# Altium PCB FCM_Integrated_other Old.PcbDoc (part 2 of 3)
Units mil, origin at the board's own origin, x right, y up, seen from the top; angles counter-clockwise.
Board outline 6000 x 4366 mil, 4 copper layers (Top Layer, Power, Ground, Bottom Layer), stack 23.756 mil thick; 165 components, 92 nets, 633 pads, 170 vias.
Unrouted connection lines stored in the file: 134.
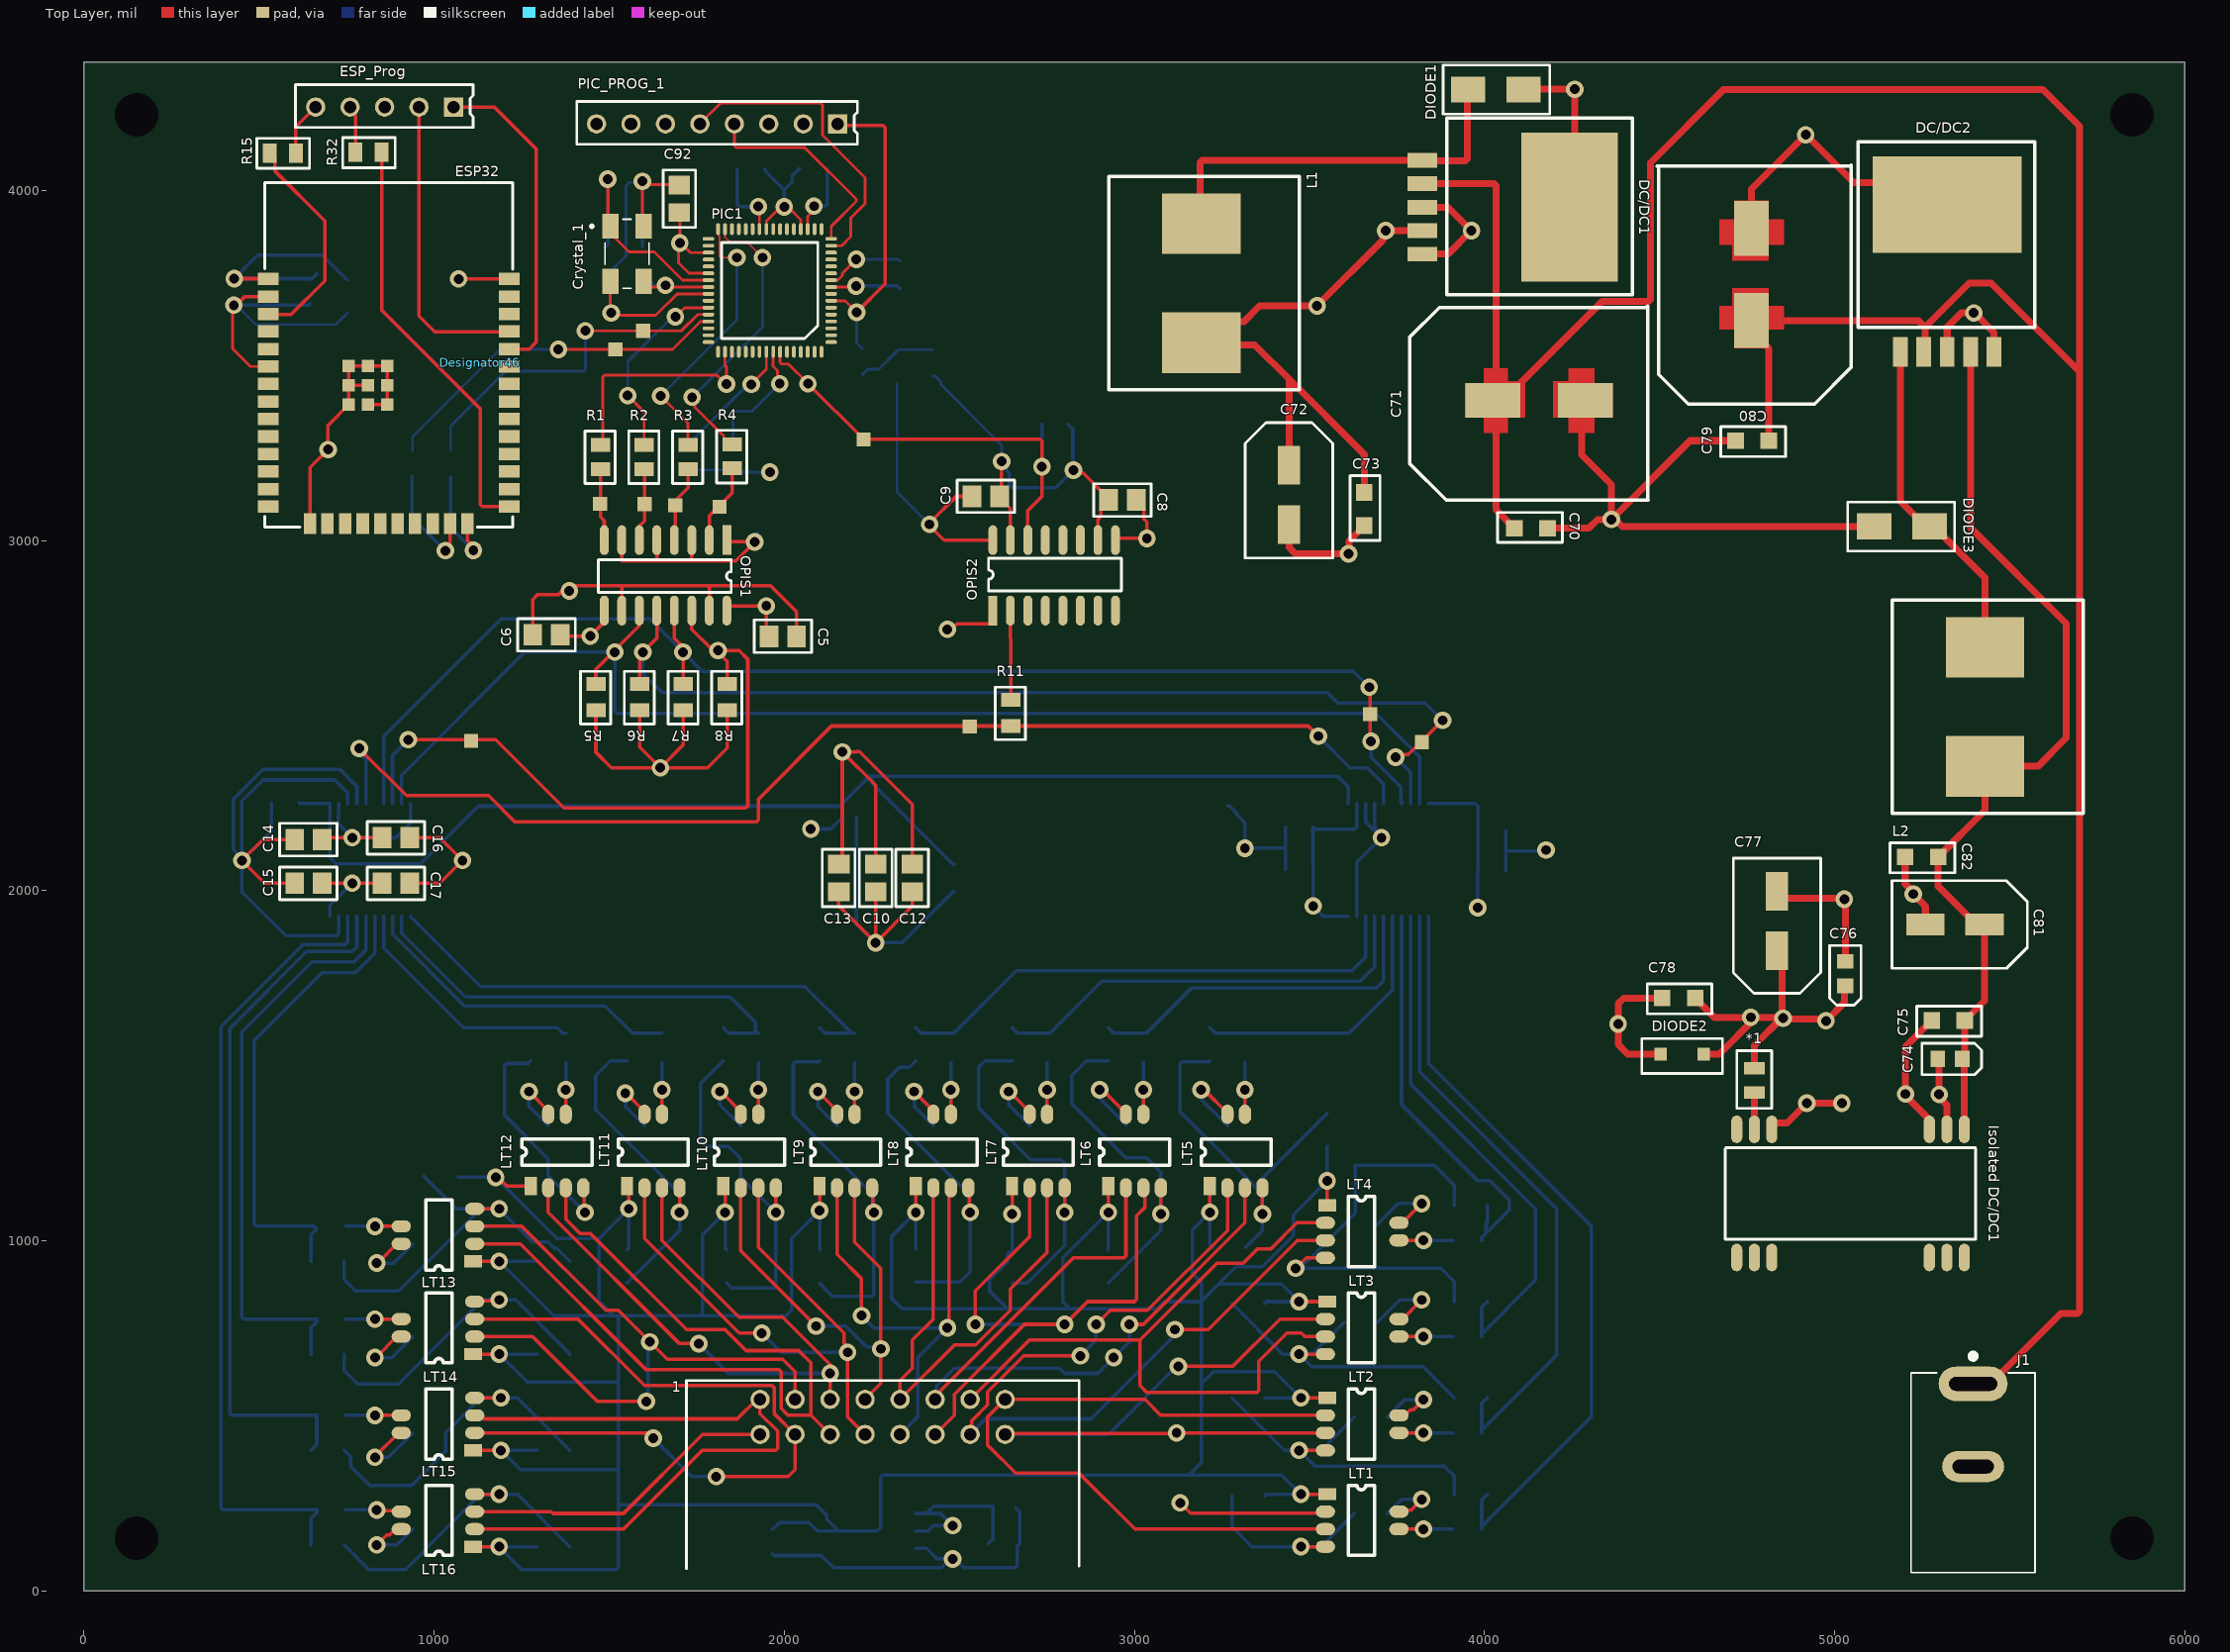
[diagram p0: Top Layer view]

## Part data (continued)
U1: "Precision Micropower, Low Dropout Voltage Reference, 2.048 V Output, 2.3 to 15 V Supply, Industrial, 8-pin SOIC (R-8), Reel", Manufacturer="Analog Devices", Operating Temp Range="-40 to 85 degC", Code_JEDEC=MS-012-AA, ComponentLink1Description="Manufacturer URL", ComponentLink1URL=http://www.analog.com/en/index.html, ComponentLink2Description=Datasheet, ComponentLink2URL=http://www.analog.com/static/imported-files/data_sheets/REF19xSeries.pdf, ComponentLink3Description="Package Specification", ComponentLink3URL=http://www.analog.com/static/imported-files/packages/PKG_PDF/SOIC_Narrow%20(R)/R_8.pdf, ComponentLink4Description="URL Link1", ComponentLink4URL="Product URL:http://www.analog.com/en/special-linear-functions/voltage-references/ref191/products/product.html", DatasheetVersion="Rev. L", Mounting Technology="Surface Mount", PackageDescription="8-Pin Standard Small Outline Package, Body 4.9 x 3.9 mm, Pitch 1.27 mm", PackageReference=R-8, PackageVersion="060506-A, 06/2006", Packing=Reel, PartNumber=REF191GSZ-REEL, Ref Out TC (ppm/C)=10, Vout=2.048V
Vref_1: library part MAX6037AAUKADJ+T, "IC VREF SERIES ADJ 0.2% SOT23-5", Case/Package=SOT-23-5, Manufacturer=Maxim, Max Input Voltage=5.5V, Max Operating Temperature=125°C, Max Output Current=5mA, Max Output Voltage=5V, Max Supply Current=250uA, Min Operating Temperature=-40°C, Min Output Voltage=1.184V, Package Quantity=1, Supplier Part Number 1=MAX6037AAUKADJ+TCT-ND, Temperature Coefficient=25ppm/°C, Tolerance=0.2%, Category="Voltage References", ComponentLink1Description=https://datasheet.ciiva.com/2008/max6037-max6037c-2008462.pdf?src-supplier=Digi-Key, ComponentLink1URL=https://datasheet.ciiva.com/2008/max6037-max6037c-2008462.pdf?src-supplier=Digi-Key, ComponentLink2Description=https://datasheet.ciiva.com/2008/max6037-max6037c-2008463.pdf?src-supplier=Digi-Key, ComponentLink2URL=https://datasheet.ciiva.com/2008/max6037-max6037c-2008463.pdf?src-supplier=Digi-Key, ComponentLink3Description=https://datasheet.ciiva.com/2008/max6037-max6037c-2008461.pdf?src-supplier=Digi-Key, ComponentLink3URL=https://datasheet.ciiva.com/2008/max6037-max6037c-2008461.pdf?src-supplier=Digi-Key, Lead Free="Lead Free", Manufacturer Part Number=MAX6037AAUKADJ+T, Mount="Surface Mount", Number of Pins=5, Operating Supply Current=250uA, Output Current=5mA, Output Type=Adjustable, Output Voltage=5V, Packaging="Tape and Reel", Radiation Hardening=No, REACH SVHC=Unknown, Reference Type=Series,Adjustable, Reference Voltage=5V, RoHS=Yes, RoHS Compliant=Yes, Series=-, Supplier 1=Digi-Key, Weight=0.001058oz

## Free pads (board coordinates)
  rect 40x40 smd: 1(1106,2428) 1(1474,3105) 1(1517.84,3545.76) 1(1597,3599) 1(1601,3104) 1(1689,3101) 1(1815,3096) 1(2227,3289) 1(2530,2469) 1(3673.5,2503.5) 1(3821,2424)
  rect 40x40 smd far side: 1(1666,244) 1(2436,2325) 1(2989,331)
  round 60 hole 125: 2(150,150) 3(150,4216) 3(5850,150) 3(5850,4216)

## Via types
v1: diameter 50, hole 28, Top Layer to Bottom Layer, 170 vias

## Nets (pads, with @x,y where several pads share a name; then routed paths per layer and width w, separated by ;. In a path a pad name is that pad's centre, name@x,y a point inside that pad or via, vN(x,y) a via of type N, cw(c..) or ccw(c..) an arc to the next point about the centre after c; other vN are vias at no path point)
2.048_VDC: C20.2 C21.1 C22.2 C25.2 C28.2 C31.2 C34.2 C37.2 C40.2 C43.2 C46.2 C48.2 C52.2 C54.2 C58.2 C60.2 C64.2 C66.2 LT1.1 LT2.1 LT3.1 LT4.1 LT5.1 LT6.1 LT7.1 LT8.1 LT9.1 LT10.1 LT11.1 LT12.1 LT13.1 LT14.1 LT15.1 LT16.1 pad.1@1666,244 pad.1@2989,331 U1.6 | length 13046
  Top Layer w10: LT16.1@1111,126 v1(1186,126) ; LT15.1@1111,401 v1(1191,401) ; LT14.1@1111,676 v1(1186,676) ; LT13.1@1111,941 v1(1186,941) ; v1(1176,1181) 1182.57,1181 1207.57,1156 LT12.1@1276,1156 ; LT11.1@1551,1156 1556,1151 v1(1556,1091) ; LT10.1@1826,1156 1831,1151 v1(1831,1081) ; v1(2101,1086) LT9.1@2101,1156 ; v1(2376,1081) LT8.1@2376,1156 ; v1(2651,1076) LT7.1@2651,1156 ; v1(2926,1081) LT6.1@2926,1156 ; v1(3216,1081) LT5.1@3216,1156 ; v1(3471,826) LT3.1@3551,826 ; v1(3476,276) LT1.1@3551,276 ; v1(3476,551) LT2.1@3551,551 ; LT4.1@3551,1101 v1(3551,1171)
  Bottom Layer w10: C64.2@1068.24,1181 v1(1176,1181) 1351,1006 1471,1006 ; C66.2@1293.76,126 v1(1186,126) 1251,61 1520.14,61 1526,66.86 1526,246 ; C60.2@1293.76,401 v1(1191,401) 1246,346 1520.14,346 1526,351.86 ; C54.2@1293.76,676 v1(1186,676) 1266,596 1520.14,596 1526,601.86 ; C48.2@1293.76,941 v1(1186,941) 1341,786 1512.72,786 ; C58.2@1551,973.24 1556,978.24 v1(1556,1091) 1471,1006 ; C52.2@1836,973.24 1831,978.24 v1(1831,1081) 1766,1016 1766,786 ; C21.1@1966,176 1966.98,176 1986.22,195.24 C20.2@2071,195.24 2095.24,171 U1.6@2155.02,171 ; C46.2@2101,973.24 v1(2101,1086) 2021,1006 2021,801 2006,786 1766,786 ; C43.2@2376,976 v1(2376,1081) 2306,1011 2306,836 2336,806 2637.27,806 ; v1(2651,1076) C40.2@2651,973.24 2637.98,960.23 2637.98,940.48 2586,888.5 2586,857.27 2637.27,806 ; C37.2@2926,973.24 v1(2926,1081) 2796,951 2796,826 2816,806 ; C34.2@3223.76,981 3216,988.76 v1(3216,1081) 3166,1031 3166,906 3191,881 3191,826 ; C22.2@3373.24,271 3378.24,276 v1(3476,276) 3421,331 3156,331 ; C25.2@3373.24,551 v1(3476,551) 3401,626 3226,626 3191,591 ; C28.2@3373.24,821 3378.24,826 v1(3471,826) 3421,876 3241,876 ; C31.2@3551,1268.76 v1(3551,1171) 3454.24,1074.24 3454.24,1015.1 3365.14,926 3291,926 3241,876 ; 1471,1006 1471,827.72 1512.72,786 ; 1512.72,786 1531,786 ; 1526,246 2091,246 2121.7,215.3 2121.7,204.31 U1.6@2155.02,171 ; 1526,246 1526,351.86 ; 1526,351.86 1526,601.86 ; 1526,601.86 1526,781 1531,786 ; 1531,786 1766,786 ; U1.6@2155.02,171 U1.6@2186.51,171 2266,171 2276,181 2276,325.14 2281.86,331 3156,331 ; 2637.27,806 2816,806 ; 2816,806 3066,806 3086,826 3191,826 ; 3156,331 3191,366 3191,591 ; 3191,591 3191,826 ; 3191,826 3241,876
5VDC: "Isolated DC/DC1.1" C74.1 C75.2 C81.1 C82.2 DC/DC2.4 L2.2 | length 2668.8
  Top Layer w10: C74.1@5365.06,1519 C74.1@5371,1513.06 ; C74.1@5365.06,1521.95 C74.1@5372.31,1529.2 ; C81.1@5405.38,1903 C81.1@5429,1903
  Top Layer w20: 5371,1318 C74.1@5371,1513.06 ; C74.1@5372.31,1529.2 C75.2@5372.31,1629 5429,1685.69 C81.1@5429,1903 ; DC/DC2.4@5388.93,3538.92 5388.93,3036.07 5662,2763 5662,2436 5581,2355 L2.2@5430,2355 5430,2229.76 C82.2@5296.24,2096 5296.24,2012.13 C81.1@5405.38,1903
+3V3: C7.1 C8.2 C9.2 C72.1 C73.2 C83.1 C85.1 C89.2 C90.2 C91.1 C92.2 DC/DC1.4 ESP32.2 L1.2 OPIS1.1 OPIS1.3 OPIS1.5 OPIS1.7 OPIS2.10 OPIS2.15 PIC1.10 PIC1.19 PIC1.26 PIC1.35 PIC1.38 PIC1.57 PIC_PROG_1.2 R9.2 R13.2 | length 5805.9
  Top Layer w8: v1(428,3672) 424,3668 424,3548 475,3497 ESP32.2@526.02,3497 ; C92.2@1700,3936.63 1701.97,3934.66 v1(1701.97,3849.63) ; PIC1.38@1783.61,3763.37 1727.63,3763.37 1698,3793 1698,3847.63 1700,3849.63 v1(1701.97,3849.63) ; PIC1.35@1783.61,3822.43 1731.14,3822.43 1703.94,3849.63 v1(1701.97,3849.63) ; v1(1926,3954) 1929.1,3950.9 1929.1,3889.53 PIC1.26@1929.28,3889.35 ; PIC1.57@1968,3523.47 1968,3498 1981,3485 1981,3454 v1(1987,3448) ; PIC1.19@2067.07,3889.35 2067.07,3925.71 2085,3943.63 v1(2085,3955) ; PIC1.10@2134,3743.68 2134.17,3743.86 2153.49,3743.86 2166,3756.37 2166,3763 v1(2206,3803)
  Top Layer w10: v1(428,3672) 434.57,3672 459.57,3697 ESP32.2@526.02,3697 ; OPIS1.7@1536,2987.18 1536,2941 1636,2941 ; OPIS1.5@1636,2987.18 1636,2941 ; OPIS1.3@1736,2987.18 1736,2946.86 1730.14,2941 ; OPIS1.1@1836,2987.18 1836,2988.4 1843.6,2996 v1(1916,2996) 1861,2941 1730.14,2941 ; v1(2621,3226) 2621,3131.63 C9.2@2615.37,3126 2615.37,3122.06 2646,3091.43 OPIS2.15@2646,3001 ; v1(2826,3201) 2833.65,3193.35 2853.22,3193.35 2926.63,3119.94 C8.2@2926.63,3116 2905.06,3094.43 2905.06,3068.74 2896,3059.69 OPIS2.10@2896,3001 ; v1@3710.35,3877.35 v1(3718,3885) ; 1636,2941 1730.14,2941
  Top Layer w20: L1.2@3246.77,3558.92 3343.68,3558.92 3442,3460.59 ; L1.2@3246.77,3573.06 3299.2,3625.49 3313.35,3625.49 3357.86,3670 v1(3522,3670) 3710.35,3858.35 v1@3710.35,3877.35 ; C72.1@3442,3214.64 3442,3460.59 ; C73.2@3657,3137.24 3657,3245.59 3442,3460.59 ; v1(3718,3885) DC/DC1.4@3823,3885
  Bottom Layer w8: v1(428,3672) 435.84,3672 490.84,3617 719.24,3617 C7.1@752,3649.76 ; C89.2@1848,3284.37 1854,3290.37 1854,3364.31 1858.69,3369 1908,3369 v1(1987,3448) ; v1(2206,3803) 2325.37,3803 C85.1@2330,3798.37 ; R13.2@2423,3470 2430.87,3470 2446.56,3454.31 2446.56,3446.44 2621,3272 v1(2621,3226)
  Bottom Layer w10: v1@435.84,3672 642,3672 C83.1@646,3676 ; C90.2@1865.63,4061 1866,4060.63 1866,3959.86 1871.86,3954 v1(1926,3954) ; 1923.65,3021.53 1923.65,3003.65 v1(1916,2996) v1@1925.86,2996 ; v1(2085,3955) 2117,3955 2122.86,3960.86 2122.86,3998.43 2122.37,3998.92 C91.1@2122.37,4062 ; v1(2621,3226) 2621,3215.18 2642.8,3193.38 2642.8,3160.06 2651.86,3151 2776,3151 v1(2826,3201) ; R9.2@2810,3332 2824.69,3317.31 2824.69,3265.12 ; v1@2824.69,3202.31 2824.69,3265.12 ; 2826,3263.8 2824.69,3265.12